# Altium PCB AX309.REV.1.0.PcbDoc (part 3 of 10)
Units mil, origin at the board's own origin, x right, y up, seen from the top; angles counter-clockwise.
Board outline 5185 x 3614 mil, 4 copper layers (Top Layer, GND, Mid-Layer 1, Bottom Layer); 191 components, 352 nets, 1106 pads, 425 vias.
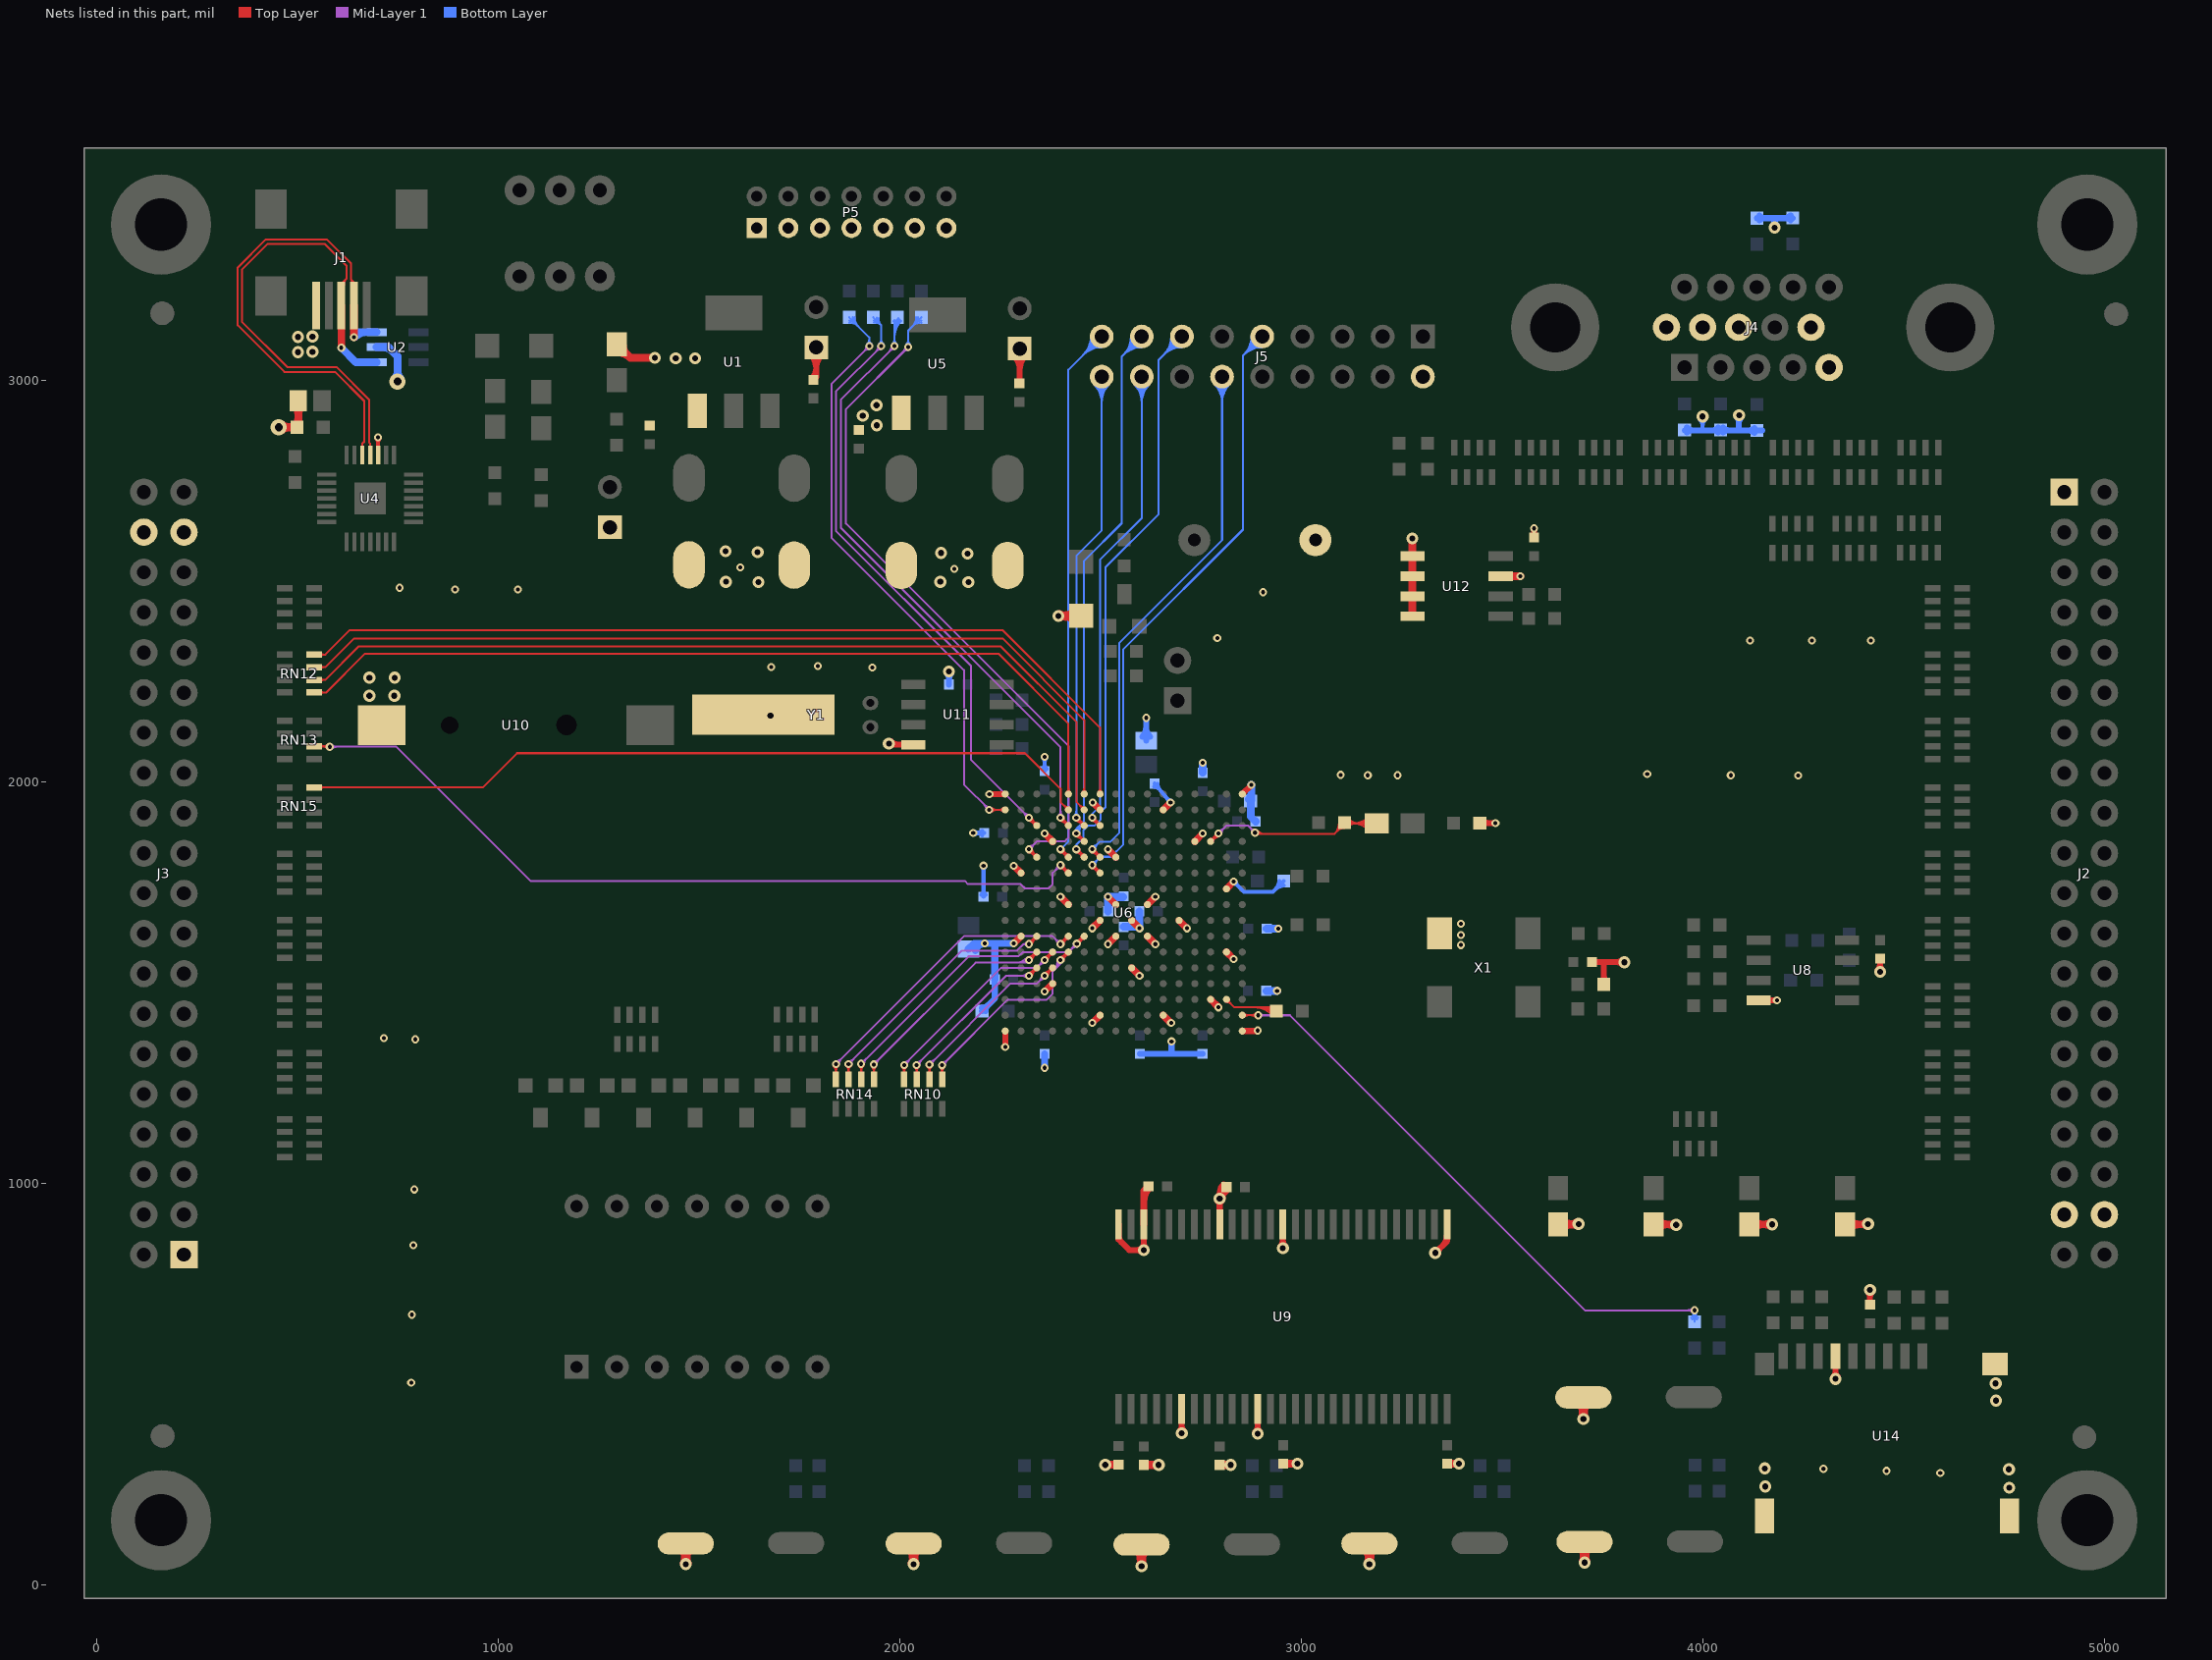
[diagram p5: the nets of this part, all layers, seen from the top]

## Via types
v1: diameter 20, hole 10, Top Layer to Bottom Layer, 328 vias
v2: diameter 30, hole 15, Top Layer to Bottom Layer, 95 vias
v3: diameter 40, hole 20, Top Layer to Bottom Layer, 2 vias

## Nets (pads, with @x,y where several pads share a name; then routed paths per layer and width w, separated by ;. In a path a pad name is that pad's centre, name@x,y a point inside that pad or via, vN(x,y) a via of type N, cw(c..) or ccw(c..) an arc to the next point about the centre after c; other vN are vias at no path point) (continued)
DIG0: RN14.7 U6.C7 | length 885.6
  Top Layer w5: v1@1867.19,1291.19 cw(c1854.39,1278.39) 1872.5,1278.39 cw(c1890.6,1278.39) v1@1877.8,1291.19 ; RN14.7@1868.7,1273.76 ccw(c1859.52,1282.93) 1872.5,1282.93 ccw(c1885.47,1282.93) RN14.7@1876.3,1273.76 ; RN14.7@1872.5,1258.15 v1(1872.5,1296.5) ; v1@2320.77,1602.69 ccw(c2318.06,1622.67) U6.C7@2335.52,1612.59 ; v1@2321.44,1597.74 ccw(c2319.79,1609.9) 2330.42,1603.76 ; v1(2321.78,1595.26) U6.C7@2341.46,1614.94 ; v1@2321.78,1602.76 ccw(c2321.78,1620.87) 2334.58,1608.06 ccw(c2347.39,1595.26) v1@2329.28,1595.26 ; v1@2323.75,1602.5 ccw(c2325.56,1609.16) 2331.54,1605.71 ; v1@2324.26,1594.92 cw(c2336.42,1593.27) 2330.28,1603.9 ; v1@2329.02,1597.23 cw(c2335.68,1599.04) 2332.23,1605.02 ; v1@2329.21,1594.25 cw(c2349.19,1591.54) U6.C7@2339.11,1609 ; U6.C7@2335.11,1614.94 cw(c2319.76,1614.94) 2330.61,1604.09 cw(c2341.46,1593.24) U6.C7@2341.46,1608.59 ; v1@2323.72,1602.5 ccw(c2325.55,1609.33) 2329.08,1603.21 cw(c2325.55,1609.33) v1@2323.72,1602.5 ; v1@2329.02,1597.2 cw(c2335.85,1599.03) 2329.73,1602.56 ccw(c2335.85,1599.03) v1@2329.02,1597.2
  Mid-Layer 1 w5: v1(1872.5,1296.5) 2155,1579 2292,1579 2308.26,1595.26 ; v1@1872.5,1304 ccw(c1872.5,1322.1) 1885.3,1309.3 ccw(c1898.1,1296.5) v1@1880,1296.5 ; v1@2315.42,1591.29 ccw(c2308.26,1586.82) 2308.26,1595.26 ; v1@2315.42,1599.23 cw(c2308.26,1603.69) 2308.26,1595.26 ; v1(2321.78,1595.26) 2308.26,1595.26
DIG1: RN10.5 U6.E6 | length 801.5
  Top Layer w5: v1@2100.18,1288.18 cw(c2087.38,1275.38) 2105.49,1275.38 cw(c2123.59,1275.38) v1@2110.79,1288.18 ; RN10.5@2101.69,1273.76 ccw(c2092.51,1282.93) 2105.49,1282.93 ccw(c2118.46,1282.93) RN10.5@2109.29,1273.76 ; RN10.5@2105.49,1258.15 v1(2105.49,1293.49) ; v1@2399.51,1563.32 ccw(c2396.8,1583.3) U6.E6@2414.26,1573.22 ; v1@2400.18,1558.37 ccw(c2398.53,1570.53) 2409.16,1564.39 ; v1(2400.52,1555.89) U6.E6@2420.2,1575.57 ; v1@2400.52,1563.39 ccw(c2400.52,1581.5) 2413.32,1568.69 ccw(c2426.13,1555.89) v1@2408.02,1555.89 ; v1@2402.49,1563.13 ccw(c2404.3,1569.79) 2410.28,1566.34 ; v1@2403,1555.55 cw(c2415.16,1553.9) 2409.02,1564.53 ; v1@2407.95,1554.88 cw(c2427.93,1552.17) U6.E6@2417.85,1569.63 ; 2410.97,1565.65 ccw(c2414.42,1559.67) v1@2407.76,1557.86 ; U6.E6@2413.85,1575.57 cw(c2398.5,1575.57) 2409.35,1564.72 cw(c2420.2,1553.87) U6.E6@2420.2,1569.22 ; v1@2407.76,1557.83 cw(c2414.59,1559.66) 2408.47,1563.19 ccw(c2414.59,1559.66) v1@2407.76,1557.83 ; v1@2402.46,1563.13 ccw(c2404.29,1569.96) 2407.82,1563.84 cw(c2404.29,1569.96) v1@2402.46,1563.13
  Mid-Layer 1 w5: v1(2105.49,1293.49) 2269,1457 2366,1457 2381,1472 2381,1527 2400.52,1546.52 v1(2400.52,1555.89) ; v1@2105.49,1300.99 ccw(c2105.49,1319.09) 2118.29,1306.29 ccw(c2131.09,1293.49) v1@2112.99,1293.49 ; 2381.09,1527.09 ccw(c2352.29,1555.89) v1@2393.02,1555.89 ; 2389.63,1535.63 ccw(c2369.36,1555.89) v1@2398.02,1555.89 ; 2398.16,1544.16 ccw(c2386.43,1555.89) v1@2403.02,1555.89
DIG2: RN10.7 U6.C5 | length 695.9
  Top Layer w5: v1@2036.7,1288.7 cw(c2022.7,1274.7) RN10.7@2042.5,1274.7 ; RN10.7@2038.7,1273.76 ccw(c2029.52,1282.93) 2042.5,1282.93 ccw(c2055.47,1282.93) RN10.7@2046.3,1273.76 ; RN10.7@2042.5,1258.15 v1@2042.5,1296.5 ; RN10.7@2042.5,1277.09 cw(c2058.91,1277.09) v1@2047.3,1288.7 ; v1@2320.77,1523.95 ccw(c2318.06,1543.93) U6.C5@2335.52,1533.85 ; v1@2321.44,1519 ccw(c2319.79,1531.16) 2330.42,1525.02 ; v1(2321.78,1516.52) U6.C5@2341.46,1536.2 ; v1@2321.78,1524.02 ccw(c2321.78,1542.13) 2334.58,1529.32 ccw(c2347.39,1516.52) v1@2329.28,1516.52 ; v1@2323.75,1523.76 ccw(c2325.56,1530.42) 2331.54,1526.97 ; v1@2324.26,1516.18 cw(c2336.42,1514.53) 2330.28,1525.16 ; v1@2329.02,1518.49 cw(c2335.68,1520.3) 2332.23,1526.28 ; v1@2329.21,1515.51 cw(c2349.19,1512.8) U6.C5@2339.11,1530.26 ; U6.C5@2335.11,1536.2 cw(c2319.76,1536.2) 2330.61,1525.35 cw(c2341.46,1514.5) U6.C5@2341.46,1529.85 ; v1@2323.72,1523.76 ccw(c2325.55,1530.59) 2329.08,1524.47 cw(c2325.55,1530.59) v1@2323.72,1523.76 ; v1@2329.02,1518.46 cw(c2335.85,1520.29) 2329.73,1523.82 ccw(c2335.85,1520.29) v1@2329.02,1518.46
  Mid-Layer 1 w5: v1(2042,1294) 2264.52,1516.52 v1(2321.78,1516.52) ; v1@2042,1301.5 ccw(c2042,1319.61) 2054.8,1306.8 ccw(c2067.61,1294) v1@2049.5,1294 ; v1@2316.48,1511.22 ccw(c2303.67,1498.41) 2303.67,1516.52 ccw(c2303.67,1534.63) v1@2316.48,1521.82
DIG3: RN14.6 U6.F7 | length 976.8
  Top Layer w5: v1@1898.69,1291.69 cw(c1885.89,1278.89) 1903.99,1278.89 cw(c1922.1,1278.89) v1@1909.3,1291.69 ; RN14.6@1900.19,1273.76 ccw(c1891.02,1282.93) 1903.99,1282.93 ccw(c1916.97,1282.93) RN14.6@1907.79,1273.76 ; RN14.6@1903.99,1258.15 v1(1903.99,1296.99) ; v1@2440.26,1603.83 ccw(c2438.55,1621.02) U6.F7@2453.51,1612.38 ; v1@2440.75,1598.86 ccw(c2439.74,1609.08) 2448.64,1603.95 ; v1(2441,1596.37) U6.F7@2459.57,1614.94 ; v1@2441,1603.87 ccw(c2441,1621.98) 2453.8,1609.17 ccw(c2466.61,1596.37) v1@2448.5,1596.37 ; v1@2443.49,1596.12 cw(c2453.71,1595.11) 2448.58,1604.01 ; v1@2443.64,1603.39 ccw(c2445.34,1607.93) 2449.54,1605.5 ; v1@2448.02,1599.01 cw(c2452.56,1600.71) 2450.13,1604.91 ; v1@2448.46,1595.63 cw(c2465.65,1593.92) U6.F7@2457.01,1608.88 ; U6.F7@2453.22,1614.94 cw(c2437.87,1614.94) 2448.72,1604.09 cw(c2459.57,1593.24) U6.F7@2459.57,1608.59 ; v1@2442.94,1603.61 ccw(c2445.13,1611.78) 2449.36,1604.46 cw(c2445.13,1611.78) v1@2442.94,1603.61 ; v1@2448.24,1598.31 cw(c2456.41,1600.5) 2449.09,1604.73 ccw(c2456.41,1600.5) v1@2448.24,1598.31
  Mid-Layer 1 w5: v1(1903.99,1296.99) 2172,1565 2296,1565 2306,1575 2419.63,1575 v1(2441,1596.37) ; v1@1903.99,1304.49 ccw(c1903.99,1322.6) 1916.8,1309.8 ccw(c1929.6,1296.99) v1@1911.49,1296.99 ; v1@2433.5,1596.37 cw(c2415.39,1596.37) 2428.2,1583.57 cw(c2441,1570.76) v1@2441,1588.87
DIG4: RN10.8 U6.D6 | length 780.1
  Top Layer w5: v1@2005.7,1288.7 cw(c1992.89,1275.89) 2011,1275.89 cw(c2029.11,1275.89) v1@2016.3,1288.7 ; RN10.8@2007.2,1273.76 ccw(c1998.03,1282.93) 2011,1282.93 ccw(c2023.97,1282.93) RN10.8@2014.8,1273.76 ; RN10.8@2011,1258.15 v1(2011,1294) ; v1@2360.14,1563.32 ccw(c2357.43,1583.3) U6.D6@2374.89,1573.22 ; v1@2360.81,1558.37 ccw(c2359.16,1570.53) 2369.79,1564.39 ; v1(2361.15,1555.89) U6.D6@2380.83,1575.57 ; v1@2361.15,1563.39 ccw(c2361.15,1581.5) 2373.95,1568.69 ccw(c2386.76,1555.89) v1@2368.65,1555.89 ; v1@2363.63,1555.55 cw(c2375.79,1553.9) 2369.65,1564.53 ; v1@2368.58,1554.88 cw(c2388.56,1552.17) U6.D6@2378.48,1569.63 ; 2370.91,1566.34 cw(c2364.93,1569.79) v1@2363.12,1563.13 ; 2371.6,1565.65 ccw(c2375.05,1559.67) v1@2368.39,1557.86 ; U6.D6@2374.48,1575.57 cw(c2359.13,1575.57) 2369.98,1564.72 cw(c2380.83,1553.87) U6.D6@2380.83,1569.22 ; v1@2363.09,1563.13 ccw(c2364.92,1569.96) 2368.45,1563.84 cw(c2364.92,1569.96) v1@2363.09,1563.13 ; v1@2368.39,1557.83 cw(c2375.22,1559.66) 2369.1,1563.19 ccw(c2375.22,1559.66) v1@2368.39,1557.83
  Mid-Layer 1 w5: v1(2011,1294) 2253.2,1536.2 2341.46,1536.2 v1(2361.15,1555.89) ; v1@2011,1301.5 ccw(c2011,1319.61) 2023.8,1306.8 ccw(c2036.61,1294) v1@2018.5,1294 ; v1@2353.65,1555.89 cw(c2335.54,1555.89) 2348.35,1543.09 cw(c2361.15,1530.28) v1@2361.15,1548.39
DIG5: RN14.8 U6.E7 | length 1023.3
  Top Layer w5: v1@1835.7,1290.7 cw(c1822.89,1277.89) 1841,1277.89 cw(c1859.11,1277.89) v1@1846.3,1290.7 ; RN14.8@1837.2,1273.76 ccw(c1828.03,1282.93) 1841,1282.93 ccw(c1853.97,1282.93) RN14.8@1844.8,1273.76 ; RN14.8@1841,1258.15 v1(1841,1296) ; v1@2399.51,1602.69 ccw(c2396.8,1622.67) U6.E7@2414.26,1612.59 ; v1@2400.18,1597.74 ccw(c2398.53,1609.9) 2409.16,1603.76 ; v1(2400.52,1595.26) U6.E7@2420.2,1614.94 ; v1@2400.52,1602.76 ccw(c2400.52,1620.87) 2413.32,1608.06 ccw(c2426.13,1595.26) v1@2408.02,1595.26 ; v1@2402.49,1602.5 ccw(c2404.3,1609.16) 2410.28,1605.71 ; v1@2403,1594.92 cw(c2415.16,1593.27) 2409.02,1603.9 ; v1@2407.76,1597.23 cw(c2414.42,1599.04) 2410.97,1605.02 ; v1@2407.95,1594.25 cw(c2427.93,1591.54) U6.E7@2417.85,1609 ; U6.E7@2413.85,1614.94 cw(c2398.5,1614.94) 2409.35,1604.09 cw(c2420.2,1593.24) U6.E7@2420.2,1608.59 ; v1@2402.46,1602.5 ccw(c2404.29,1609.33) 2407.82,1603.21 cw(c2404.29,1609.33) v1@2402.46,1602.5 ; v1@2407.76,1597.2 cw(c2414.59,1599.03) 2408.47,1602.56 ccw(c2414.59,1599.03) v1@2407.76,1597.2
  Mid-Layer 1 w5: v1(1841,1296) 2160,1615 2380.78,1615 v1(2400.52,1595.26) ; v1@1841,1303.5 ccw(c1841,1321.61) 1853.8,1308.8 ccw(c1866.61,1296) v1@1848.5,1296 ; v1@2393.02,1595.26 ccw(c2374.91,1595.26) 2387.72,1608.06 ccw(c2400.52,1620.87) v1@2400.52,1602.76
DIG6: RN10.6 U6.D5 | length 701.4
  Top Layer w5: v1@2068.69,1289.69 cw(c2055.89,1276.89) 2073.99,1276.89 cw(c2092.1,1276.89) v1@2079.3,1289.69 ; RN10.6@2070.19,1273.76 ccw(c2061.02,1282.93) 2073.99,1282.93 ccw(c2086.97,1282.93) RN10.6@2077.79,1273.76 ; RN10.6@2073.99,1258.15 v1(2073.99,1294.99) ; v1@2360.14,1523.95 ccw(c2357.43,1543.93) U6.D5@2374.89,1533.85 ; v1@2360.81,1519 ccw(c2359.16,1531.16) 2369.79,1525.02 ; v1(2361.15,1516.52) U6.D5@2380.83,1536.2 ; v1@2361.15,1524.02 ccw(c2361.15,1542.13) 2373.95,1529.32 ccw(c2386.76,1516.52) v1@2368.65,1516.52 ; v1@2363.63,1516.18 cw(c2375.79,1514.53) 2369.65,1525.16 ; v1@2368.39,1518.49 cw(c2375.05,1520.3) 2371.6,1526.28 ; v1@2368.58,1515.51 cw(c2388.56,1512.8) U6.D5@2378.48,1530.26 ; 2370.91,1526.97 cw(c2364.93,1530.42) v1@2363.12,1523.76 ; U6.D5@2374.48,1536.2 cw(c2359.13,1536.2) 2369.98,1525.35 cw(c2380.83,1514.5) U6.D5@2380.83,1529.85 ; v1@2363.09,1523.76 ccw(c2364.92,1530.59) 2368.45,1524.47 cw(c2364.92,1530.59) v1@2363.09,1523.76 ; v1@2368.39,1518.46 cw(c2375.22,1520.29) 2369.1,1523.82 ccw(c2375.22,1520.29) v1@2368.39,1518.46
  Mid-Layer 1 w5: v1(2073.99,1294.99) 2276,1497 2341.63,1497 v1(2361.15,1516.52) ; v1@2073.99,1302.49 ccw(c2073.99,1320.6) 2086.8,1307.8 ccw(c2099.6,1294.99) v1@2081.49,1294.99 ; v1@2353.65,1516.52 cw(c2335.54,1516.52) 2348.35,1503.72 cw(c2361.15,1490.91) v1@2361.15,1509.02
DIG7: RN14.5 U6.C6 | length 858.3
  Top Layer w5: v1@1930.18,1290.21 cw(c1917.38,1277.41) 1935.49,1277.41 cw(c1953.59,1277.41) v1@1940.79,1290.21 ; RN14.5@1931.69,1273.76 ccw(c1922.51,1282.93) 1935.49,1282.93 ccw(c1948.46,1282.93) RN14.5@1939.29,1273.76 ; RN14.5@1935.49,1258.15 v1(1935.49,1295.51) ; v1@2320.77,1563.32 ccw(c2318.06,1583.3) U6.C6@2335.52,1573.22 ; v1@2321.44,1558.37 ccw(c2319.79,1570.53) 2330.42,1564.39 ; v1(2321.78,1555.89) U6.C6@2341.46,1575.57 ; v1@2321.78,1563.39 ccw(c2321.78,1581.5) 2334.58,1568.69 ccw(c2347.39,1555.89) v1@2329.28,1555.89 ; v1@2323.75,1563.13 ccw(c2325.56,1569.79) 2331.54,1566.34 ; v1@2324.26,1555.55 cw(c2336.42,1553.9) 2330.28,1564.53 ; v1@2329.21,1554.88 cw(c2349.19,1552.17) U6.C6@2339.11,1569.63 ; 2332.23,1565.65 ccw(c2335.68,1559.67) v1@2329.02,1557.86 ; U6.C6@2335.11,1575.57 cw(c2319.76,1575.57) 2330.61,1564.72 cw(c2341.46,1553.87) U6.C6@2341.46,1569.22 ; v1@2329.02,1557.83 cw(c2335.85,1559.66) 2329.73,1563.19 ccw(c2335.85,1559.66) v1@2329.02,1557.83 ; v1@2323.72,1563.13 ccw(c2325.55,1569.96) 2329.08,1563.84 cw(c2325.55,1569.96) v1@2323.72,1563.13
  Mid-Layer 1 w5: v1(1935.49,1295.51) 2188.98,1549 2314.89,1549 v1(2321.78,1555.89) ; v1@1935.49,1303.01 ccw(c1935.49,1321.12) 1948.29,1308.32 ccw(c1961.09,1295.51) v1@1942.99,1295.51 ; 2287.04,1549 ccw(c2287.04,1590.63) v1@2316.48,1561.19 ; 2299.11,1549 ccw(c2299.11,1578.56) v1@2320.01,1557.66 ; 2311.18,1549 ccw(c2311.18,1566.48) v1@2323.55,1554.12
DM: J1.2 U2.3 U4.5 | length 1328.1
  Top Layer w5: J1.2@634.29,3239.43 ccw(c626.41,3244.41) 633,3251 ; 637.42,3246.58 cw(c631.83,3240.99) J1.2@638.52,3236.76 ; J1.2@640.5,3186.3 640.5,3243.5 633,3251 ; U4.5@659.27,2834.3 ccw(c654.46,2839.1) 661.26,2839.1 ccw(c668.06,2839.1) U4.5@663.25,2834.3 ; U4.5@661.26,2814 661.26,2842.26 666,2847 666,2948.44 593.44,3021 467,3021 351,3137 351,3281 421,3351 573,3351 633,3291 633,3251
  Top Layer w19: v1(640.5,3107) J1.2@640.5,3186.3
  Bottom Layer w19: v1(640.5,3107) 653.5,3120 U2.3@697,3120 ; v1@640.85,3106.65 cw(c673.09,3074.41) U2.3@673.09,3120
DP: J1.3 U2.1 U4.4 | length 1329.8
  Top Layer w5: J1.3@609,3186.3 609,3241 622,3254 ; J1.3@611.32,3235.86 cw(c624.19,3237.78) 614.99,3246.99 ; J1.3@616.26,3236.6 cw(c636.39,3239.61) 622,3254 ; U4.4@678.95,2834.3 ccw(c674.15,2839.1) 680.94,2839.1 ccw(c687.74,2839.1) U4.4@682.94,2834.3 ; U4.4@680.94,2814 680.94,2842.06 677.97,2845.03 677.97,2952.03 597,3033 474,3033 362,3145 362,3276.44 425.56,3340 567,3340 622,3285 622,3254
  Top Layer w19: v1(609,3081) J1.3@609,3186.3
  Bottom Layer w19: v1(609,3081) 645,3045 U2.1@697,3045
E11: RN13.6 U6.E11 | length 2330.2
  Top Layer w5: RN13.6@541.15,2088.26 v1@578.74,2088.26 ; RN13.6@556.76,2084.46 cw(c565.93,2075.28) 565.93,2088.26 cw(c565.93,2101.23) RN13.6@556.76,2092.06 ; RN13.6@558.86,2088.26 cw(c558.86,2065.86) v1@574.7,2081.7 ; 564.93,2088.26 ccw(c564.93,2102.07) v1@574.7,2092.3 ; v1@2399.51,1784.68 cw(c2396.8,1764.7) U6.E11@2414.26,1774.78 ; v1@2400.18,1789.63 cw(c2398.53,1777.47) 2409.16,1783.61 ; v1@2400.52,1784.61 cw(c2400.52,1766.5) 2413.32,1779.31 cw(c2426.13,1792.11) v1@2408.02,1792.11 ; v1(2400.52,1792.11) U6.E11@2420.2,1772.43 ; v1@2402.49,1784.87 cw(c2404.3,1778.21) 2410.28,1781.66 ; v1@2403,1792.45 ccw(c2415.16,1794.1) 2409.02,1783.47 ; v1@2407.95,1793.12 ccw(c2427.93,1795.83) U6.E11@2417.85,1778.37 ; 2410.97,1782.35 cw(c2414.42,1788.33) v1@2407.76,1790.14 ; U6.E11@2413.85,1772.43 ccw(c2398.5,1772.43) 2409.35,1783.28 ccw(c2420.2,1794.13) U6.E11@2420.2,1778.78 ; v1@2407.76,1790.17 ccw(c2414.59,1788.34) 2408.47,1784.81 cw(c2414.59,1788.34) v1@2407.76,1790.17 ; v1@2402.46,1784.87 cw(c2404.29,1778.04) 2407.82,1784.16 ccw(c2404.29,1778.04) v1@2402.46,1784.87
  Mid-Layer 1 w5: v1(580,2087) 746,2087 1081,1752 2163,1752 2170,1745 2301,1745 2312,1734 2370,1734 2381,1745 2381,1772.59 v1(2400.52,1792.11) ; v1@585.3,2081.7 cw(c598.11,2068.89) 598.11,2087 cw(c598.11,2105.11) v1@585.3,2092.3 ; v1@2393.02,1792.11 cw(c2374.91,1792.11) 2387.72,1779.31 cw(c2400.52,1766.5) v1@2400.52,1784.61
E12: J5.17 U6.E12 | length 1750.7
  Top Layer w5: v1@2399.51,1824.05 cw(c2396.8,1804.07) U6.E12@2414.26,1814.15 ; v1@2400.18,1829 cw(c2398.53,1816.84) 2409.16,1822.98 ; v1@2400.52,1823.98 cw(c2400.52,1805.87) 2413.32,1818.68 cw(c2426.13,1831.48) v1@2408.02,1831.48 ; v1(2400.52,1831.48) U6.E12@2420.2,1811.8 ; v1@2402.49,1824.24 cw(c2404.3,1817.58) 2410.28,1821.03 ; v1@2403,1831.82 ccw(c2415.16,1833.47) 2409.02,1822.84 ; v1@2407.76,1829.51 ccw(c2414.42,1827.7) 2410.97,1821.72 ; v1@2407.95,1832.49 ccw(c2427.93,1835.2) U6.E12@2417.85,1817.74 ; U6.E12@2413.85,1811.8 ccw(c2398.5,1811.8) 2409.35,1822.65 ccw(c2420.2,1833.5) U6.E12@2420.2,1818.15 ; v1@2402.46,1824.24 cw(c2404.29,1817.41) 2407.82,1823.53 ccw(c2404.29,1817.41) v1@2402.46,1824.24 ; v1@2407.76,1829.54 ccw(c2414.59,1827.71) 2408.47,1824.18 cw(c2414.59,1827.71) v1@2407.76,1829.54
  Bottom Layer w5: v1(2400.52,1831.48) 2420,1850.96 2420,3026.17 J5.17@2503,3109.17 ; J5.17@2475.97,3109.17 cw(c2410.72,3109.17) 2456.86,3063.03 cw(c2503,3016.9) J5.17@2503,3082.15 ; J5.17@2480.97,3109.17 cw(c2427.79,3109.17) 2465.4,3071.57 cw(c2503,3033.97) J5.17@2503,3087.15 ; J5.17@2485.97,3109.17 cw(c2444.86,3109.17) 2473.93,3080.11 cw(c2503,3051.04) J5.17@2503,3092.15
E15: RN15.8 U6.E15 | length 2036.5
  Top Layer w5: RN15.8@541.15,1985.88 961.88,1985.88 1047,2071 2312,2071 2401,1982 2401,1949.11 U6.E15@2420.2,1929.91 ; RN15.8@556.76,1982.08 cw(c565.93,1972.9) 565.93,1985.88 cw(c565.93,1998.85) RN15.8@556.76,1989.67 ; U6.E15@2413.85,1929.91 ccw(c2398.5,1929.91) 2409.35,1940.76 ccw(c2420.2,1951.61) U6.E15@2420.2,1936.26
E16: RN12.5 U6.E16 | length 2211.3
  Top Layer w5: RN12.5@541.15,2222.14 571.14,2222.14 668,2319 2246,2319 2420.2,2144.8 U6.E16@2420.2,1969.28 ; RN12.5@556.76,2218.34 cw(c565.93,2209.16) 565.93,2222.14 cw(c565.93,2235.11) RN12.5@556.76,2225.94 ; U6.E16@2415.71,1973.77 ccw(c2404.85,1984.63) 2420.2,1984.63 ccw(c2435.55,1984.63) U6.E16@2424.7,1973.77
F12: J5.13 U6.F12 | length 1838
  Top Layer w5: v1@2438.88,1824.05 cw(c2436.17,1804.07) U6.F12@2453.63,1814.15 ; v1@2439.55,1829 cw(c2437.9,1816.84) 2448.53,1822.98 ; v1@2439.89,1823.98 cw(c2439.89,1805.87) 2452.69,1818.68 cw(c2465.5,1831.48) v1@2447.39,1831.48 ; v1(2439.89,1831.48) U6.F12@2459.57,1811.8 ; v1@2442.37,1831.82 ccw(c2454.53,1833.47) 2448.39,1822.84 ; v1@2447.13,1829.51 ccw(c2453.79,1827.7) 2450.34,1821.72 ; v1@2447.32,1832.49 ccw(c2467.3,1835.2) U6.F12@2457.22,1817.74 ; 2449.65,1821.03 ccw(c2443.67,1817.58) v1@2441.86,1824.24 ; U6.F12@2453.22,1811.8 ccw(c2437.87,1811.8) 2448.72,1822.65 ccw(c2459.57,1833.5) U6.F12@2459.57,1818.15 ; v1@2441.83,1824.24 cw(c2443.66,1817.41) 2447.19,1823.53 ccw(c2443.66,1817.41) v1@2441.83,1824.24 ; v1@2447.13,1829.54 ccw(c2453.96,1827.71) 2447.84,1824.18 cw(c2453.96,1827.71) v1@2447.13,1829.54
  Bottom Layer w5: v1@2436.92,1838.37 ccw(c2434.96,1842.89) 2439.89,1842.89 ; v1(2439.89,1831.48) 2439.89,1842.89 ; v1@2442.86,1838.37 cw(c2444.81,1842.89) 2439.89,1842.89 ; J5.13@2675.97,3109.17 cw(c2610.72,3109.17) 2656.86,3063.03 cw(c2703,3016.9) J5.13@2703,3082.15 ; J5.13@2680.97,3109.17 cw(c2627.79,3109.17) 2665.4,3071.57 cw(c2703,3033.97) J5.13@2703,3087.15 ; J5.13@2685.97,3109.17 cw(c2644.86,3109.17) 2673.93,3080.11 cw(c2703,3051.04) J5.13@2703,3092.15 ; J5.13@2703,3109.17 2645,3051.17 2645,2667 2513,2535 2513,1937 2500,1924 2500,1905 2486,1891 2470,1891 2458,1879 2458,1861 2439.89,1842.89
F13: J5.15 U6.F13 | length 1826.1
  Top Layer w5: v1@2438.88,1863.42 cw(c2436.17,1843.44) U6.F13@2453.63,1853.52 ; v1@2439.55,1868.37 cw(c2437.9,1856.21) 2448.53,1862.35 ; v1@2439.89,1863.35 cw(c2439.89,1845.24) 2452.69,1858.05 cw(c2465.5,1870.85) v1@2447.39,1870.85 ; v1(2439.89,1870.85) U6.F13@2459.57,1851.17 ; v1@2442.37,1871.19 ccw(c2454.53,1872.84) 2448.39,1862.21 ; v1@2447.32,1871.86 ccw(c2467.3,1874.57) U6.F13@2457.22,1857.11 ; 2449.65,1860.4 ccw(c2443.67,1856.95) v1@2441.86,1863.61 ; 2450.34,1861.09 cw(c2453.79,1867.07) v1@2447.13,1868.88 ; U6.F13@2453.22,1851.17 ccw(c2437.87,1851.17) 2448.72,1862.02 ccw(c2459.57,1872.87) U6.F13@2459.57,1857.52 ; v1@2441.83,1863.61 cw(c2443.66,1856.78) 2447.19,1862.9 ccw(c2443.66,1856.78) v1@2441.83,1863.61 ; v1@2447.13,1868.91 ccw(c2453.96,1867.08) 2447.84,1863.55 cw(c2453.96,1867.08) v1@2447.13,1868.91
  Bottom Layer w5: v1@2436.58,1877.58 ccw(c2433.98,1882.89) 2439.89,1882.89 ; v1@2437.39,1870.7 cw(c2457.67,1871.94) 2443.3,1886.3 ; v1(2439.89,1870.85) 2439.89,1882.89 ; v1@2442.38,1871 cw(c2472.46,1872.85) 2451.15,1894.15 ; v1@2443.19,1877.58 cw(c2445.8,1882.89) 2439.89,1882.89 ; v1@2447.37,1871.31 cw(c2487.24,1873.76) 2459,1902 ; J5.15@2575.97,3109.17 cw(c2510.72,3109.17) 2556.86,3063.03 cw(c2603,3016.9) J5.15@2603,3082.15 ; J5.15@2580.97,3109.17 cw(c2527.79,3109.17) 2565.4,3071.57 cw(c2603,3033.97) J5.15@2603,3087.15 ; J5.15@2585.97,3109.17 cw(c2544.86,3109.17) 2573.93,3080.11 cw(c2603,3051.04) J5.15@2603,3092.15 ; J5.15@2603,3109.17 2553,3059.17 2553,2644 2459,2550 2459,1902 ; 2439.89,1882.89 2459,1902
F14: J5.18 U6.F14 | length 1584.1
  Top Layer w5: v1@2438.88,1902.79 cw(c2436.17,1882.81) U6.F14@2453.63,1892.89 ; v1@2439.55,1907.74 cw(c2437.9,1895.58) 2448.53,1901.72 ; v1@2439.89,1902.72 cw(c2439.89,1884.61) 2452.69,1897.42 cw(c2465.5,1910.22) v1@2447.39,1910.22 ; v1(2439.89,1910.22) U6.F14@2459.57,1890.54 ; v1@2442.37,1910.56 ccw(c2454.53,1912.21) 2448.39,1901.58 ; v1@2447.13,1908.25 ccw(c2453.79,1906.44) 2450.34,1900.46 ; v1@2447.32,1911.23 ccw(c2467.3,1913.94) U6.F14@2457.22,1896.48 ; 2449.65,1899.77 ccw(c2443.67,1896.32) v1@2441.86,1902.98 ; U6.F14@2453.22,1890.54 ccw(c2437.87,1890.54) 2448.72,1901.39 ccw(c2459.57,1912.24) U6.F14@2459.57,1896.89 ; v1@2441.83,1902.98 cw(c2443.66,1896.15) 2447.19,1902.27 ccw(c2443.66,1896.15) v1@2441.83,1902.98 ; v1@2447.13,1908.28 ccw(c2453.96,1906.45) 2447.84,1902.92 cw(c2453.96,1906.45) v1@2447.13,1908.28
  Bottom Layer w5: v1@2434.59,1915.52 ccw(c2421.78,1928.33) 2439.89,1928.33 ccw(c2458,1928.33) v1@2445.19,1915.52 ; v1(2439.89,1910.22) 2439.89,2562.89 2503,2626 J5.18@2503,3009.17 ; J5.18@2483.89,2990.06 cw(c2437.75,2943.92) 2503,2943.92 cw(c2568.25,2943.92) J5.18@2522.11,2990.06 ; J5.18@2487.42,2993.6 cw(c2449.82,2955.99) 2503,2955.99 cw(c2556.18,2955.99) J5.18@2518.58,2993.6 ; J5.18@2490.96,2997.13 cw(c2461.89,2968.07) 2503,2968.07 cw(c2544.11,2968.07) J5.18@2515.04,2997.13
F15: RN12.6 U6.F15 | length 2282.9
  Top Layer w5: RN12.6@541.15,2253.63 568.63,2253.63 652,2337 2252,2337 2440,2149 2440,1949.48 U6.F15@2459.57,1929.91 ; RN12.6@556.76,2249.83 cw(c565.93,2240.66) 565.93,2253.63 cw(c565.93,2266.61) RN12.6@556.76,2257.43 ; U6.F15@2453.22,1929.91 ccw(c2437.87,1929.91) 2448.72,1940.76 ccw(c2459.57,1951.61) U6.F15@2459.57,1936.26
F16: RN12.7 U6.F16 | length 2261.2
  Top Layer w5: RN12.7@541.15,2285.13 568.84,2285.13 640.71,2357 2256,2357 2459.57,2153.43 U6.F16@2459.57,1969.28 ; RN12.7@556.76,2281.33 cw(c565.93,2272.15) 565.93,2285.13 cw(c565.93,2298.1) RN12.7@556.76,2288.93 ; U6.F16@2455.08,1973.77 ccw(c2444.22,1984.63) 2459.57,1984.63 ccw(c2474.92,1984.63) U6.F16@2464.07,1973.77
FPGA_DONE: LED5.1 R17.1 U6.P13 | length 1043.5
  Top Layer w5: U6.P13@2774.54,1851.17 v1(2794.22,1870.85) ; U6.P13@2774.54,1857.52 ccw(c2774.54,1872.87) 2785.39,1862.02 ccw(c2796.24,1851.17) U6.P13@2780.89,1851.17 ; U6.P13@2776.89,1857.11 ccw(c2766.81,1874.57) v1@2786.79,1871.86 ; U6.P13@2780.48,1853.52 cw(c2797.94,1843.44) v1@2795.23,1863.42 ; 2783.77,1861.09 ccw(c2780.32,1867.07) v1@2786.98,1868.88 ; 2784.46,1860.4 cw(c2790.44,1856.95) v1@2792.25,1863.61 ; 2785.58,1862.35 cw(c2796.21,1856.21) v1@2794.56,1868.37 ; 2785.72,1862.21 ccw(c2779.58,1872.84) v1@2791.74,1871.19 ; v1@2786.72,1870.85 cw(c2768.61,1870.85) 2781.42,1858.05 cw(c2794.22,1845.24) v1@2794.22,1863.35 ; v1(2885,1873) 2888,1870 3083,1870 ; v1@2886.77,1874.77 ccw(c2898.28,1886.28) 2898.28,1870 ; v1@2890.3,1867.7 cw(c2895.86,1862.14) 2895.86,1870 ; v1@2890.3,1878.3 ccw(c2910.35,1898.35) 2910.35,1870 ; 3090.08,1877.08 cw(c3108,1859.15) R17.1@3108,1884.5 ; 3091.48,1878.48 ccw(c3072.13,1897.84) R17.1@3099.5,1897.96 ; R17.1@3094.5,1897.94 cw(c3055.24,1897.76) 3083,1870 ; R17.1@3114.01,1904.01 ccw(c3133.35,1923.35) 3133.35,1896 ; R17.1@3117.55,1888.45 cw(c3135.76,1870.24) 3135.76,1896 ; R17.1@3117.55,1907.55 ccw(c3145.42,1935.42) 3145.42,1896 ; LED5.1@3167.09,1880.09 ccw(c3128.68,1841.68) 3128.68,1896 ccw(c3128.68,1950.32) LED5.1@3167.09,1911.91 ; LED5.1@3170.63,1883.63 ccw(c3140.75,1853.75) 3140.75,1896 ccw(c3140.75,1938.25) LED5.1@3170.63,1908.37 ; LED5.1@3174.16,1887.16 ccw(c3152.82,1865.82) 3152.82,1896 ccw(c3152.82,1926.18) LED5.1@3174.16,1904.84 ; LED5.1@3188,1896 3109,1896 3083,1870 ; v1@2786.98,1868.91 cw(c2780.15,1867.08) 2786.27,1863.55 ccw(c2780.15,1867.08) v1@2786.98,1868.91 ; 2786.92,1862.9 cw(c2790.45,1856.78) 2792.28,1863.61 ccw(c2790.45,1856.78) 2786.92,1862.9
  Mid-Layer 1 w5: v1(2794.22,1870.85) 2813.91,1890.54 2867.46,1890.54 v1(2885,1873) ; v1@2794.22,1878.35 ccw(c2794.22,1896.46) 2807.02,1883.65 ccw(c2819.83,1870.85) v1@2801.72,1870.85 ; v1@2877.5,1873 ccw(c2859.39,1873) 2872.2,1885.8 ccw(c2885,1898.61) v1@2885,1880.5
FPGA_INIT_B: R9.1 U6.R3 | length 309
  Top Layer w5: U6.R3@2813.91,1451.11 cw(c2813.91,1435.76) 2824.76,1446.61 cw(c2835.61,1457.46) U6.R3@2820.26,1457.46 ; U6.R3@2813.91,1457.46 2833.37,1438 R9.1@2938,1438 ; 2881.27,1438 cw(c2881.27,1371.27) R9.1@2928.45,1418.45 ; 2893.34,1438 cw(c2893.34,1383.34) R9.1@2931.99,1421.99 ; 2905.41,1438 cw(c2905.41,1395.41) R9.1@2935.53,1425.53 ; 2917.48,1438 cw(c2917.48,1407.48) R9.1@2939.06,1429.06
FPGA_PROG_B: R22.1 U6.T2 | length 1696.7
  Top Layer w5: U6.T2@2853.28,1418.09 v1@2892.55,1418.09 ; U6.T2@2857.77,1413.6 cw(c2868.63,1402.74) 2868.63,1418.09 cw(c2868.63,1433.44) U6.T2@2857.77,1422.59 ; 2874.31,1418.09 cw(c2874.31,1399.67) v1@2887.34,1412.7 ; 2874.77,1418.09 ccw(c2874.77,1435.88) v1@2887.34,1423.3
  Mid-Layer 1 w5: v1(2892.65,1418) 2972,1418 3707,683 v1(3980,683) ; v1@2897.95,1412.7 cw(c2910.75,1399.89) 2910.75,1418 cw(c2910.75,1436.11) v1@2897.95,1423.3 ; v1@3974.7,677.7 ccw(c3961.89,664.89) 3961.89,683 ccw(c3961.89,701.11) v1@3974.7,688.3
  Bottom Layer w5: R22.1@3971.31,664.33 ccw(c3955.61,683) v1(3980,683) ; R22.1@3974.53,660.5 ccw(c3964.64,672.26) 3980,672.26 ccw(c3995.36,672.26) R22.1@3985.47,660.5 ; v1@3974.7,677.7 cw(c3961.89,664.89) 3980,664.89 cw(c3998.11,664.89) v1@3985.3,677.7 ; v1@3974.83,677.57 cw(c3970.08,672.58) 3976.73,670.8 cw(c3983.38,669.02) v1@3981.76,675.71 ; v1@3978.24,675.71 cw(c3976.62,669.02) 3983.27,670.8 cw(c3989.92,672.58) v1@3985.17,677.57 ; R22.1@3980,654 v1(3980,683) ; R22.1@3988.69,664.33 cw(c4004.39,683) v1(3980,683)
FPGA_TCK: R28.2 U6.C14 | length 1831.3
  Top Layer w5: v1@2321.04,1902.56 cw(c2318.54,1883.14) U6.C14@2335.49,1892.93 ; v1@2321.68,1907.52 cw(c2320.16,1895.75) 2330.44,1901.68 ; v1@2322,1902.5 cw(c2322,1884.39) 2334.8,1897.2 cw(c2347.61,1910) v1@2329.5,1910 ; v1(2322,1910) U6.C14@2341.46,1890.54 ; v1@2324.09,1902.8 cw(c2325.9,1896.57) 2331.52,1899.81 ; v1@2324.48,1910.32 ccw(c2336.25,1911.84) 2330.32,1901.56 ; v1@2329.2,1907.91 ccw(c2335.43,1906.1) 2332.19,1900.48 ; v1@2329.44,1910.96 ccw(c2348.86,1913.46) U6.C14@2339.07,1896.51 ; U6.C14@2335.11,1890.54 ccw(c2319.76,1890.54) 2330.61,1901.39 ccw(c2341.46,1912.24) U6.C14@2341.46,1896.89 ; v1@2323.94,1902.76 cw(c2325.84,1895.66) 2329.52,1902.02 ccw(c2325.84,1895.66) v1@2323.94,1902.76 ; v1@2329.24,1908.06 ccw(c2336.34,1906.16) 2329.98,1902.48 cw(c2336.34,1906.16) v1@2329.24,1908.06
  Mid-Layer 1 w5: v1@1946.5,3085 cw(c1928.39,3085) 1941.2,3072.2 cw(c1954,3059.39) v1@1954,3077.5 ; v1(1954,3085) 1841,2972 1841,2625 2178,2288 2178,2054 v1(2322,1910) ; v1@2314.5,1910 ccw(c2296.39,1910) 2309.2,1922.8 ccw(c2322,1935.61) v1@2322,1917.5
  Bottom Layer w5: R28.2@1934,3157 1954,3137 ; R28.2@1934.89,3148.55 cw(c1936.41,3134.22) 1946.59,3144.41 cw(c1956.78,3154.59) R28.2@1942.45,3156.11 ; R28.2@1935.42,3143.57 cw(c1937.82,3120.82) 1954,3137 ; R28.2@1947.43,3155.58 ccw(c1970.18,3153.18) 1954,3137 ; v1@1948.7,3090.3 ccw(c1935.89,3103.11) 1954,3103.11 ccw(c1972.11,3103.11) v1@1959.3,3090.3 ; v1(1954,3085) 1954,3137
FPGA_TDI: R48.2 U6.C12 | length 2063.3
  Top Layer w5: v1@2320.77,1824.05 cw(c2318.06,1804.07) U6.C12@2335.52,1814.15 ; v1@2321.44,1829 cw(c2319.79,1816.84) 2330.42,1822.98 ; v1@2321.78,1823.98 cw(c2321.78,1805.87) 2334.58,1818.68 cw(c2347.39,1831.48) v1@2329.28,1831.48 ; v1(2321.78,1831.48) U6.C12@2341.46,1811.8 ; v1@2323.75,1824.24 cw(c2325.56,1817.58) 2331.54,1821.03 ; v1@2324.26,1831.82 ccw(c2336.42,1833.47) 2330.28,1822.84 ; v1@2329.02,1829.51 ccw(c2335.68,1827.7) 2332.23,1821.72 ; v1@2329.21,1832.49 ccw(c2349.19,1835.2) U6.C12@2339.11,1817.74 ; U6.C12@2335.11,1811.8 ccw(c2319.76,1811.8) 2330.61,1822.65 ccw(c2341.46,1833.5) U6.C12@2341.46,1818.15 ; v1@2323.72,1824.24 cw(c2325.55,1817.41) 2329.08,1823.53 ccw(c2325.55,1817.41) v1@2323.72,1824.24 ; v1@2329.02,1829.54 ccw(c2335.85,1827.71) 2329.73,1824.18 cw(c2335.85,1827.71) v1@2329.02,1829.54
  Mid-Layer 1 w5: v1@2013.5,3083 cw(c1995.39,3083) 2008.2,3070.2 cw(c2021,3057.39) v1@2021,3075.5 ; v1(2021,3083) 1866,2928 1866,2643 2421,2088 2421,1862 2410,1851 2341.3,1851 v1(2321.78,1831.48) ; v1@2321.78,1838.98 ccw(c2321.78,1857.09) 2334.58,1844.28 ccw(c2347.39,1831.48) v1@2329.28,1831.48
  Bottom Layer w5: v1@2015.7,3088.3 ccw(c2002.89,3101.11) 2021,3101.11 ccw(c2039.11,3101.11) v1@2026.3,3088.3 ; v1(2021,3083) 2021,3124 R48.2@2054,3157 ; R48.2@2040.5,3157 cw(c2007.91,3157) 2030.95,3133.95 cw(c2054,3110.91) R48.2@2054,3143.5 ; R48.2@2045.5,3157 cw(c2024.98,3157) 2039.49,3142.49 cw(c2054,3127.98) R48.2@2054,3148.5
FPGA_TDO: R29.2 U6.E14 | length 1898.8
  Top Layer w5: v1@2399.51,1902.79 cw(c2396.8,1882.81) U6.E14@2414.26,1892.89 ; v1@2400.18,1907.74 cw(c2398.53,1895.58) 2409.16,1901.72 ; v1@2400.52,1902.72 cw(c2400.52,1884.61) 2413.32,1897.42 cw(c2426.13,1910.22) v1@2408.02,1910.22 ; v1(2400.52,1910.22) U6.E14@2420.2,1890.54 ; v1@2402.49,1902.98 cw(c2404.3,1896.32) 2410.28,1899.77 ; v1@2403,1910.56 ccw(c2415.16,1912.21) 2409.02,1901.58 ; v1@2407.76,1908.25 ccw(c2414.42,1906.44) 2410.97,1900.46 ; v1@2407.95,1911.23 ccw(c2427.93,1913.94) U6.E14@2417.85,1896.48 ; U6.E14@2413.85,1890.54 ccw(c2398.5,1890.54) 2409.35,1901.39 ccw(c2420.2,1912.24) U6.E14@2420.2,1896.89 ; v1@2402.46,1902.98 cw(c2404.29,1896.15) 2407.82,1902.27 ccw(c2404.29,1896.15) v1@2402.46,1902.98 ; v1@2407.76,1908.28 ccw(c2414.59,1906.45) 2408.47,1902.92 cw(c2414.59,1906.45) v1@2407.76,1908.28
  Mid-Layer 1 w5: v1@1979.5,3085 cw(c1961.39,3085) 1974.2,3072.2 cw(c1987,3059.39) v1@1987,3077.5 ; v1(1987,3085) 1853,2951 1853,2633 2400.52,2085.48 v1(2400.52,1910.22) ; v1@2395.22,1915.52 ccw(c2382.41,1928.33) 2400.52,1928.33 ccw(c2418.63,1928.33) v1@2405.82,1915.52
  Bottom Layer w5: v1@1981.7,3090.3 ccw(c1968.89,3103.11) 1987,3103.11 ccw(c2005.11,3103.11) v1@1992.3,3090.3 ; R29.2@1984.45,3147.45 cw(c1978.31,3141.31) R29.2@1987,3141.31 ; v1(1987,3085) R29.2@1987,3150 ; 1987,3107.51 cw(c2043.49,3107.51) R29.2@2003.55,3147.45 ; 1987,3119.58 cw(c2031.42,3119.58) R29.2@2000.01,3150.99 ; 1987,3131.65 cw(c2019.35,3131.65) R29.2@1996.47,3154.53
FPGA_TMS: R8.2 U6.A15 | length 1710.5
  Top Layer w5: v1(2223.09,1929.91) U6.A15@2262.72,1929.91 ; v1@2228.4,1924.6 cw(c2241.2,1911.8) 2241.2,1929.91 cw(c2241.2,1948.01) v1@2228.4,1935.21 ; U6.A15@2258.23,1925.41 ccw(c2247.37,1914.56) 2247.37,1929.91 ccw(c2247.37,1945.26) U6.A15@2258.23,1934.4
  Mid-Layer 1 w5: v1@1916.5,3085 cw(c1898.39,3085) 1911.2,3072.2 cw(c1924,3059.39) v1@1924,3077.5 ; v1(1924,3085) 1830,2991 1830,2608 2160,2278 2160,1993 v1(2223.09,1929.91) ; v1@2215.59,1929.91 ccw(c2197.49,1929.91) 2210.29,1942.71 ccw(c2223.09,1955.51) v1@2223.09,1937.41
  Bottom Layer w5: R8.2@1874,3143.5 cw(c1874,3110.91) 1897.05,3133.95 cw(c1920.09,3157) R8.2@1887.5,3157 ; R8.2@1874,3148.5 cw(c1874,3127.98) 1888.51,3142.49 cw(c1903.02,3157) R8.2@1882.5,3157 ; R8.2@1874,3157 1924,3107 v1(1924,3085) ; v1@1918.7,3090.3 ccw(c1905.89,3103.11) 1924,3103.11 ccw(c1942.11,3103.11) v1@1929.3,3090.3
G11: J5.9 U6.G11 | length 1966.7
  Top Layer w5: v1@2478.25,1784.68 cw(c2475.54,1764.7) U6.G11@2493,1774.78 ; v1@2478.92,1789.63 cw(c2477.27,1777.47) 2487.9,1783.61 ; v1@2479.26,1784.61 cw(c2479.26,1766.5) 2492.06,1779.31 cw(c2504.87,1792.11) v1@2486.76,1792.11 ; v1(2479.26,1792.11) U6.G11@2498.94,1772.43 ; v1@2481.23,1784.87 cw(c2483.04,1778.21) 2489.02,1781.66 ; v1@2481.74,1792.45 ccw(c2493.9,1794.1) 2487.76,1783.47 ; v1@2486.69,1793.12 ccw(c2506.67,1795.83) U6.G11@2496.59,1778.37 ; 2489.71,1782.35 cw(c2493.16,1788.33) v1@2486.5,1790.14 ; U6.G11@2492.59,1772.43 ccw(c2477.24,1772.43) 2488.09,1783.28 ccw(c2498.94,1794.13) U6.G11@2498.94,1778.78 ; v1@2486.5,1790.17 ccw(c2493.33,1788.34) 2487.21,1784.81 cw(c2493.33,1788.34) v1@2486.5,1790.17 ; v1@2481.2,1784.87 cw(c2483.03,1778.04) 2486.56,1784.16 ccw(c2483.03,1778.04) v1@2481.2,1784.87
  Bottom Layer w5: v1(2479.26,1792.11) 2500.15,1813 2526,1813 2557,1844 2557,2330 2855,2628 2855,3061.17 J5.9@2903,3109.17 ; v1@2479.26,1799.61 ccw(c2479.26,1817.72) 2492.06,1804.91 ccw(c2504.87,1792.11) v1@2486.76,1792.11 ; J5.9@2875.97,3109.17 cw(c2810.72,3109.17) 2856.86,3063.03 cw(c2903,3016.9) J5.9@2903,3082.15 ; J5.9@2880.97,3109.17 cw(c2827.79,3109.17) 2865.4,3071.57 cw(c2903,3033.97) J5.9@2903,3087.15 ; J5.9@2885.97,3109.17 cw(c2844.86,3109.17) 2873.93,3080.11 cw(c2903,3051.04) J5.9@2903,3092.15
G12: J5.12 U6.G12 | length 1786.1
  Top Layer w5: v1@2478.25,1824.05 cw(c2475.54,1804.07) U6.G12@2493,1814.15 ; v1@2478.92,1829 cw(c2477.27,1816.84) 2487.9,1822.98 ; v1@2479.26,1823.98 cw(c2479.26,1805.87) 2492.06,1818.68 cw(c2504.87,1831.48) v1@2486.76,1831.48 ; v1(2479.26,1831.48) U6.G12@2498.94,1811.8 ; v1@2481.23,1824.24 cw(c2483.04,1817.58) 2489.02,1821.03 ; v1@2481.74,1831.82 ccw(c2493.9,1833.47) 2487.76,1822.84 ; v1@2486.5,1829.51 ccw(c2493.16,1827.7) 2489.71,1821.72 ; v1@2486.69,1832.49 ccw(c2506.67,1835.2) U6.G12@2496.59,1817.74 ; U6.G12@2492.59,1811.8 ccw(c2477.24,1811.8) 2488.09,1822.65 ccw(c2498.94,1833.5) U6.G12@2498.94,1818.15 ; v1@2481.2,1824.24 cw(c2483.03,1817.41) 2486.56,1823.53 ccw(c2483.03,1817.41) v1@2481.2,1824.24 ; v1@2486.5,1829.54 ccw(c2493.33,1827.71) 2487.21,1824.18 cw(c2493.33,1827.71) v1@2486.5,1829.54
  Bottom Layer w5: v1(2479.26,1831.48) 2497.78,1850 2524,1850 2547,1873 2547,2346 2803,2602 J5.12@2803,3009.17 ; v1@2479.26,1838.98 ccw(c2479.26,1857.09) 2492.06,1844.28 ccw(c2504.87,1831.48) v1@2486.76,1831.48 ; J5.12@2783.89,2990.06 cw(c2737.75,2943.92) 2803,2943.92 cw(c2868.25,2943.92) J5.12@2822.11,2990.06 ; J5.12@2787.42,2993.6 cw(c2749.82,2955.99) 2803,2955.99 cw(c2856.18,2955.99) J5.12@2818.58,2993.6 ; J5.12@2790.96,2997.13 cw(c2761.89,2968.07) 2803,2968.07 cw(c2844.11,2968.07) J5.12@2815.04,2997.13
G14: J5.16 U6.G14 | length 1580.7
  Top Layer w5: v1@2478.25,1902.79 cw(c2475.54,1882.81) U6.G14@2493,1892.89 ; v1@2478.92,1907.74 cw(c2477.27,1895.58) 2487.9,1901.72 ; v1@2479.26,1902.72 cw(c2479.26,1884.61) 2492.06,1897.42 cw(c2504.87,1910.22) v1@2486.76,1910.22 ; v1(2479.26,1910.22) U6.G14@2498.94,1890.54 ; v1@2481.23,1902.98 cw(c2483.04,1896.32) 2489.02,1899.77 ; v1@2481.74,1910.56 ccw(c2493.9,1912.21) 2487.76,1901.58 ; v1@2486.5,1908.25 ccw(c2493.16,1906.44) 2489.71,1900.46 ; v1@2486.69,1911.23 ccw(c2506.67,1913.94) U6.G14@2496.59,1896.48 ; U6.G14@2492.59,1890.54 ccw(c2477.24,1890.54) 2488.09,1901.39 ccw(c2498.94,1912.24) U6.G14@2498.94,1896.89 ; v1@2481.2,1902.98 cw(c2483.03,1896.15) 2486.56,1902.27 ccw(c2483.03,1896.15) v1@2481.2,1902.98 ; v1@2486.5,1908.28 ccw(c2493.33,1906.45) 2487.21,1902.92 cw(c2493.33,1906.45) v1@2486.5,1908.28
  Bottom Layer w5: v1(2479.26,1910.22) 2479.26,1919.26 2499,1939 2499,2553 2603,2657 J5.16@2603,3009.17 ; J5.16@2583.89,2990.06 cw(c2537.75,2943.92) 2603,2943.92 cw(c2668.25,2943.92) J5.16@2622.11,2990.06 ; J5.16@2587.42,2993.6 cw(c2549.82,2955.99) 2603,2955.99 cw(c2656.18,2955.99) J5.16@2618.58,2993.6 ; J5.16@2590.96,2997.13 cw(c2561.89,2968.07) 2603,2968.07 cw(c2644.11,2968.07) J5.16@2615.04,2997.13
G16: RN12.8 U6.G16 | length 2293.3
  Top Layer w5: RN12.8@541.15,2316.62 568.84,2316.62 629.21,2377 2257,2377 2498.94,2135.06 U6.G16@2498.94,1969.28 ; RN12.8@556.76,2312.83 cw(c565.93,2303.65) 565.93,2316.62 cw(c565.93,2329.6) RN12.8@556.76,2320.42 ; U6.G16@2494.45,1973.77 ccw(c2483.59,1984.63) 2498.94,1984.63 ccw(c2514.3,1984.63) U6.G16@2503.44,1973.77
GND: C1.2 C2.2 C3.2 C4.1 C5.2 C6.2 C7.2 C8.2 C9.2 C10.2 C11.2 C12.2 C13.2 C14.2 C15.2 C16.2 C17.2 C18.2 C19.2 C20.2 C25.2 C27.2 C29.2 C30.2 C31.2 C32.2 C33.2 C34.2 C35.2 C36.2 C37.2 C38.2 C39.2 C40.2 C41.2 C42.2 C43.2 C44.2 C45.2 C46.2 C48.2 C49.2 D1.1 EC2.2 EC4.2 EC5.2 EC6.2 J1.5 J2.1 J2.37 J2.38 J3.1 J3.37 J3.38 J4.5 J4.6 J4.7 J4.8 J4.10 J5.2 K1.2 K2.2 K3.1 K4.2 K5.2 K6.1 LED0.2 LED1.2 LED2.2 LED3.2 LED6.2 LS1.2 P1.1 P2.1 P4.1 P5.1 P5.3 P5.5 P5.7 P5.9 P5.11 P5.13 R10.1 R20.1 R49.2 R51.2 U1.1 U2.2 U4.3 U5.1 U6.A1 U6.A16 U6.B7 U6.B11 U6.D4 U6.D13 U6.E9 U6.G2 U6.G8 U6.G15 U6.H7 U6.H9 U6.H12 U6.J5 U6.J8 U6.K7 U6.K9 U6.L2 U6.L15 U6.M8 U6.N13 U6.P3 U6.R6 U6.R10 U6.T1 U6.T16 U8.4 U9.6 U9.12 U9.28 U9.41 U9.46 U9.52 U9.54 U10.2 U11.4 U12.1 U12.2 U12.3 U12.4 U12.7 U14.6 U14.11 U14.12 U14.13 X1.2 Y1.0 | length 8366.7
  Top Layer w10: v1@697.09,2854.09 cw(c688.56,2845.56) 700.63,2845.56 cw(c712.7,2845.56) v1@704.17,2854.09 ; U4.3@700.63,2814 v1(700.63,2857.63) ; LED1.2@3878.33,897 v2@3933,897 ; LED1.2@3892.48,882.86 cw(c3926.62,848.72) 3926.62,897 cw(c3926.62,945.28) LED1.2@3892.48,911.14 ; 3907.29,891.82 cw(c3913.63,868.16) v2@3928.1,887.93 ; 3907.44,897 cw(c3907.44,869.44) v2@3926.93,888.93 ; 3908.23,901.93 ccw(c3915.32,928.36) v2@3929,904.66 ; 3912.27,897 ccw(c3912.27,917.73) v2@3926.93,903.07 ; 3912.64,900.75 cw(c3907.23,880.54) v2@3925.34,891 ; 3916.64,894.33 ccw(c3912.94,908.16) v2@3925.34,901 ; LED2.2@4116.67,897 v2(4173,897) ; LED2.2@4130.81,882.86 cw(c4164.95,848.72) 4164.95,897 cw(c4164.95,945.28) LED2.2@4130.81,911.14 ; 4144.3,891.47 cw(c4152.38,861.31) v2@4168,888.34 ; 4144.3,902.53 ccw(c4152.38,932.69) v2@4168,905.66 ; 4154,894.07 ccw(c4149.59,910.51) v2@4164.34,902 ; 4154,899.93 cw(c4149.59,883.49) v2@4164.34,892 ; v2@4165.93,889.93 ccw(c4148.86,872.86) 4148.86,897 ccw(c4148.86,921.14) v2@4165.93,904.07 ; LED3.2@4355,897 v2@4411,897 ; LED3.2@4369.14,882.86 cw(c4403.28,848.72) 4403.28,897 cw(c4403.28,945.28) LED3.2@4369.14,911.14 ; 4384.53,902.02 ccw(c4391.1,926.52) v2@4406.09,906.07 ; 4385.34,892.19 cw(c4392.73,864.62) v2@4407,889.34 ; 4385.44,897 ccw(c4385.44,924.56) v2@4404.93,905.07 ; 4390.27,897 cw(c4390.27,876.27) v2@4404.93,890.93 ; 4391.35,893.8 ccw(c4386.25,912.87) v2@4403.34,903 ; 4395.36,899.12 cw(c4391.96,886.43) v2@4403.34,893
  Top Layer w15: P2.1@1776.42,3066.42 cw(c1738.82,3028.82) 1792,3028.82 cw(c1845.18,3028.82) P2.1@1807.58,3066.42 ; C45.2@1781.46,3004.78 ccw(c1756.03,3030.21) 1792,3030.21 ; C45.2@1785,3001.24 1792,3008.24 P2.1@1792,3082 ; v2(1973,2095) 1976,2092 U11.4@2034,2092 ; v2@1978.3,2100.3 ccw(c1998.35,2120.35) 1998.35,2092 ; v1@2223.63,1969.28 U6.A16@2262.72,1969.28 ; v1(2262.72,1339.35) U6.A1@2262.72,1378.72 ; P4.1@2283.42,3063.42 cw(c2245.82,3025.82) 2299,3025.82 cw(c2352.18,3025.82) P4.1@2314.58,3063.42 ; C49.2@2294.46,2995.78 ccw(c2283.51,3006.73) 2299,3006.73 ; C49.2@2298,2992.24 2299,2993.24 P4.1@2299,3079 ; v2(2395,2413) D1.1@2452,2413 ; v2@2398.75,2406.5 cw(c2408.99,2388.77) 2414.29,2408.55 ; v2@2398.75,2419.5 ccw(c2408.99,2437.23) 2414.29,2417.45 ; v2@2400.3,2407.7 cw(c2413.11,2394.89) 2413.11,2413 cw(c2413.11,2431.11) v2@2400.3,2418.3 ; v2@2401.5,2409.25 cw(c2415.12,2401.38) 2411.05,2416.58 ; v2@2401.5,2416.75 ccw(c2415.12,2424.62) 2411.05,2409.42 ; D1.1@2436.09,2397.09 ccw(c2397.68,2358.68) 2397.68,2413 ccw(c2397.68,2467.32) D1.1@2436.09,2428.91 ; U9.54@2545,897 2545,860 2572,833 v2(2608,833) U9.52@2607.99,897 ; U9.54@2546,868 ccw(c2567.73,868) 2552.36,852.64 ; v2@2602.7,827.7 ccw(c2589.89,814.89) 2589.89,833 ccw(c2589.89,851.11) 2602.7,838.3 ccw(c2589.91,851.09) 2607.99,851.09 ; 2607.99,851.13 ccw(c2626.13,851.13) v2@2613.3,838.3 ; v2@2697.18,381.82 ccw(c2684.37,394.63) 2702.48,394.63 ccw(c2720.59,394.63) v2@2707.78,381.82 ; v2(2702.48,376.52) U9.6@2702.48,437 ; v2@2791.67,955.7 cw(c2778.86,942.89) 2796.97,942.89 cw(c2815.08,942.89) v2@2802.27,955.7 ; v2@2795.37,968.33 ccw(c2789.11,997.13) C35.2@2813.9,981.19 ; U9.46@2796.97,897 2796.97,973.21 C35.2@2813.76,990 ccw(c2837.12,966.63) v2@2804.4,962.04 ; 2796.97,937.4 cw(c2866.36,937.4) C35.2@2817.29,986.46 ; v2@2796.97,966.26 cw(c2815.8,966.26) C35.2@2814.18,985.02 ; v2@2796.97,973.61 cw(c2830.14,973.61) C35.2@2806.68,997.07 ; 2799.95,984.74 ccw(c2823.1,978.53) v2@2803.2,965.18 ; U6.T1@2853.28,1378.72 v1@2890.72,1378.72 ; U6.T16@2853.28,1969.28 v1(2876,1992) ; v2@2886.15,380.85 ccw(c2873.35,393.65) 2891.46,393.65 ccw(c2909.56,393.65) v2@2896.76,380.85 ; v2(2891.46,375.54) U9.12@2891.46,437 ; v2@2949.15,843.3 ccw(c2936.34,856.11) 2954.45,856.11 ccw(c2972.56,856.11) v2@2959.75,843.3 ; v2(2954.45,838) U9.41@2954.45,907.55 ; v2(3334,826) 3363.9,855.9 U9.28@3363.9,897 ; v2@3334,833.5 ccw(c3334,851.61) 3346.8,838.8 ccw(c3359.61,826) v2@3341.5,826 ; X1.2@3334,1633 X1.2@3345,1622 ; 3353.63,845.63 ccw(c3331.27,868) U9.28@3362.9,868 ; R20.1@3445,1897 v1(3484,1897) ; R20.1@3451.01,1890.99 cw(c3465.52,1876.48) 3465.52,1897 cw(c3465.52,1917.52) R20.1@3451.01,1903.01 ; C37.2@3580,2608.24 v1(3580,2631) ; LED0.2@3640,897 v2@3690,897 ; LED0.2@3652.37,884.63 cw(c3682.25,854.75) 3682.25,897 cw(c3682.25,939.25) LED0.2@3652.37,909.37 ; 3666.53,901.21 ccw(c3673.2,926.09) v2@3686.99,904.34 ; 3670.14,893.76 cw(c3675.98,871.98) v2@3687.25,891.5 ; 3670.48,897 ccw(c3670.48,918.52) v2@3685.7,903.3 ; 3675.31,897 cw(c3675.31,882.31) v2@3685.7,892.7 ; 3676.2,895.38 ccw(c3672.67,908.59) v2@3684.5,901.75 ; C3.2@3724.24,1551 v2@3805,1551 ; C46.2@3747.99,1501.01 ccw(c3733.48,1515.52) 3754,1515.52 ccw(c3774.52,1515.52) C46.2@3760.01,1501.01 ; C46.2@3754,1495 3754,1549 ; 3784.48,1551 cw(c3784.48,1529.48) v2@3799.7,1544.7 ; 3789.31,1551 ccw(c3789.31,1565.69) v2@3799.7,1555.3 ; U8.4@4140,1455 v1(4185,1455) ; v2@4325.74,517.35 ccw(c4312.94,530.15) 4331.05,530.15 ccw(c4349.15,530.15) v2@4336.35,517.35 ; v2(4331.05,512.05) U14.6@4331.05,568.82 ; v2@4411.7,728.7 cw(c4398.89,715.89) 4417,715.89 cw(c4435.11,715.89) v2@4422.3,728.7 ; C43.2@4417,697.24 v2(4417,734) ; v2@4436.7,1531.3 ccw(c4423.89,1544.11) 4442,1544.11 ccw(c4460.11,1544.11) v2@4447.3,1531.3 ; v2(4442,1526) C4.1@4442,1559
  Top Layer w17.72: v1(2284,1596.85) U6.B7@2302.09,1614.94 ; v1(2284,1790.52) U6.B11@2302.09,1772.43 ; v1(2361.15,1477.15) U6.D4@2380.83,1496.83 ; v1(2361.15,1870.85) U6.D13@2380.83,1851.17 ; v1(2400.52,1713.37) U6.E9@2420.2,1693.68 ; v1(2479.26,1634.63) U6.G8@2498.94,1654.32 ; v1(2479.85,1399) U6.G2@2498.94,1418.09 ; v1(2481,1947.85) U6.G15@2498.94,1929.91 ; v1(2518.63,1595.26) U6.H7@2538.32,1614.94 ; v1(2518.63,1713.37) U6.H9@2538.32,1693.68 ; v1(2518.63,1831.48) U6.H12@2538.32,1811.8 ; U6.J5@2577.68,1536.2 v1(2597.37,1516.52) ; U6.J8@2577.68,1654.32 v1(2597.37,1634.63) ; U9.52@2607.99,897 2607.99,980.24 C34.2@2619.76,992 ; 2607.99,954.81 cw(c2656.95,954.81) C34.2@2622.33,989.42 ; U6.K7@2617.06,1614.94 v1(2636.74,1595.26) ; U6.K9@2617.06,1693.68 v1(2636.74,1713.37) ; U6.L2@2656.43,1418.09 v1@2673.52,1401 ; U6.L15@2656.43,1929.91 v1(2674.52,1948) ; U6.M8@2695.8,1654.32 v1(2715.48,1634.63) ; U6.N13@2735.17,1851.17 v1(2754.85,1870.85) ; U6.P3@2774.54,1457.46 v1(2794.22,1437.78) ; U6.R6@2813.91,1575.57 v1(2831.48,1558) ; U6.R10@2813.91,1733.06 v1(2832,1751.15)
  Top Layer w19.68: v3(453,2883) C1.2@499,2883 501.94,2883 C2.2@501.94,2949 ; v3@460.18,2875.82 cw(c477.52,2858.48) 477.52,2883 cw(c477.52,2907.52) v3@460.18,2890.18 ; C2.2@493.59,2935.53 cw(c473.43,2915.37) 501.94,2915.37 cw(c530.46,2915.37) C2.2@510.3,2935.53 ; C1.2@494.65,2887.35 ccw(c477.02,2904.98) 501.94,2904.98 ; LED6.2@1295,3090 1329,3056 ; LED6.2@1295.14,3069.84 cw(c1295.58,3022.58) 1329,3056 ; LED6.2@1310.16,3085 ccw(c1334.68,3085) LED6.2@1317.34,3067.66 ; v2(1390,3056) 1329,3056
  Top Layer w20: K1.2@1454.58,89.58 cw(c1424.61,59.61) 1467,59.61 cw(c1509.39,59.61) K1.2@1479.42,89.58 ; v2@1462.67,53.09 ccw(c1445.31,63.11) 1464.67,68.3 ; v2(1467,50.59) K1.2@1467,102 ; 1469.33,68.3 ccw(c1488.69,63.11) v2@1471.33,53.09 ; K2.2@2022.25,89.58 cw(c1992.28,59.61) 2034.67,59.61 cw(c2077.06,59.61) K2.2@2047.08,89.58 ; v2@2030.34,53.09 ccw(c2012.98,63.11) 2032.34,68.3 ; v2(2034.67,50.59) K2.2@2034.67,102 ; 2036.99,68.3 ccw(c2056.35,63.11) v2@2039,53.09 ; v2@2512,298.76 C30.2@2545,298.76 ; K3.1@2589.92,86.79 cw(c2559.94,56.81) 2602.33,56.81 cw(c2644.72,56.81) K3.1@2614.75,86.79 ; v2@2598,47.7 ccw(c2578.67,58.87) 2600.23,64.65 ; v2(2602.33,45.2) K3.1@2602.33,99.2 ; 2604.43,64.65 ccw(c2626,58.87) v2@2606.66,47.7 ; C29.2@2607.99,297.76 2607.99,298 v2(2645,298) ; C31.2@2797,297.76 v2(2824.24,297.76) ; C32.2@2955,300.76 v2(2990.76,300.76) ; K4.2@3157.58,89.58 cw(c3127.61,59.61) 3170,59.61 cw(c3212.39,59.61) K4.2@3182.42,89.58 ; v2@3165.67,53.09 ccw(c3148.31,63.11) 3167.67,68.3 ; v2(3170,50.59) K4.2@3170,102 ; 3172.33,68.3 ccw(c3191.69,63.11) v2@3174.33,53.09 ; U12.4@3277,2412 U12.3@3277,2462 U12.2@3277,2512 U12.1@3277,2562 v2(3277,2606) ; C33.2@3364,300.76 v2(3392.76,300.76) ; U12.7@3497,2512 v1(3546,2512) ; K6.1@3690.58,453.58 cw(c3660.61,423.61) 3703,423.61 cw(c3745.39,423.61) K6.1@3715.42,453.58 ; K5.2@3693.58,93.58 cw(c3663.61,63.61) 3706,63.61 cw(c3748.39,63.61) K5.2@3718.42,93.58 ; v2@3698.67,414.5 ccw(c3679.33,425.66) 3700.9,431.44 ; v2@3701.67,57.09 ccw(c3684.31,67.11) 3703.67,72.3 ; v2(3703,412) K6.1@3703,466 ; 3705.1,431.44 ccw(c3726.67,425.66) v2@3707.33,414.5 ; v2(3706,54.59) K5.2@3706,106 ; 3708.33,72.3 ccw(c3727.69,67.11) v2@3710.33,57.09
  Bottom Layer w10: v1(2183,1872) C13.2@2210.76,1872 ; v1@2186.22,1868.18 cw(c2194.28,1858.61) 2197.52,1870.69 ; v1@2186.22,1875.82 ccw(c2194.28,1885.39) 2197.52,1873.31 ; v1@2186.54,1868.46 cw(c2195.07,1859.93) 2195.07,1872 cw(c2195.07,1884.07) v1@2186.54,1875.54 ; C14.2@2203.45,1718.3 ccw(c2190.65,1731.11) 2208.76,1731.11 ccw(c2226.86,1731.11) C14.2@2214.06,1718.3 ; v1@2205.22,1787.22 cw(c2196.68,1778.68) 2208.76,1778.68 cw(c2220.83,1778.68) v1@2212.29,1787.22 ; C13.2@2205.45,1866.7 ccw(c2192.65,1853.89) 2192.65,1872 ccw(c2192.65,1890.11) C13.2@2205.45,1877.3 ; C14.2@2208.76,1713 v1(2208.76,1790.76) ; C12.2@2355.7,2031.55 ccw(c2342.89,2044.35) 2361,2044.35 ccw(c2379.11,2044.35) C12.2@2366.3,2031.55 ; v1@2357.46,2058.46 cw(c2348.93,2049.93) 2361,2049.93 cw(c2373.07,2049.93) v1@2364.54,2058.46 ; C12.2@2361,2026.24 v1(2361,2062) ; C11.2@2634.33,1987.77 cw(c2632.73,1969.74) 2646.62,1981.36 cw(c2660.51,1992.97) C11.2@2642.47,1994.58 ; C11.2@2635,1995.24 v1(2674.52,1948) ; v1@2669.54,1948.44 ccw(c2657.52,1949.51) 2666.77,1957.26 ccw(c2676.03,1965) v1@2674.96,1952.98 ; v1@2832,1746.15 cw(c2832,1734.08) 2840.54,1742.61 cw(c2849.07,1751.15) v1@2837,1751.15 ; v1(2832,1751.15) 2857.15,1726 2930,1726 R51.2@2956,1752 ; R51.2@2945,1752 cw(c2918.44,1752) 2937.22,1733.22 cw(c2956,1714.44) R51.2@2956,1741 ; v2@3992.93,2902.93 cw(c3975.86,2885.86) 4000,2885.86 cw(c4024.14,2885.86) v2@4007.07,2902.93 ; 4000,2875 v2(4000,2910)
  Bottom Layer w15: v2@2117.45,2269.45 cw(c2104.65,2256.65) 2122.76,2256.65 cw(c2140.86,2256.65) v2@2128.06,2269.45 ; C36.2@2122.76,2242 v2(2122.76,2274.76) ; R49.2@2205,1428 2236.76,1459.76 C16.2@2236.76,1507 ; R49.2@2205,1436.5 ccw(c2205,1457.02) 2219.51,1442.51 ccw(c2234.02,1428) R49.2@2213.5,1428 ; C17.2@2598,1321.76 C18.2@2754,1321.76 ; C5.2@2603.99,2112.06 ccw(c2579.83,2136.22) 2614,2136.22 ccw(c2648.17,2136.22) C5.2@2624.01,2112.06 ; C5.2@2614,2102.06 v1(2614,2159) ; 2677,1323.76 v1(2677,1353) ; C38.2@3956,2875 4000,2875 4090,2875 ; C38.2@3961.01,2869.99 cw(c3973.11,2857.89) 3973.11,2875 ; C38.2@3961.01,2882.01 ccw(c3977.94,2898.93) 3977.94,2875 ; 4022.06,2875 ccw(c4022.06,2898.93) C39.2@4038.99,2882.01 ; 4026.89,2875 cw(c4026.89,2857.89) C39.2@4038.99,2869.99 ; C39.2@4051.01,2869.99 cw(c4063.11,2857.89) 4063.11,2875 ; C39.2@4051.01,2882.01 ccw(c4067.94,2898.93) 4067.94,2875 ; v2@4085.7,2907.7 cw(c4075.31,2897.31) 4090,2897.31 ; 4090,2892.48 cw(c4111.52,2892.48) v2@4096.3,2907.7 ; v2@4090,2912 4090,2875 ; C40.2@4128.99,2868.99 ccw(c4114.48,2854.48) 4114.48,2875 ccw(c4114.48,2895.52) C40.2@4128.99,2881.01 ; C41.2@4135,3404 4179.5,3404 ; C41.2@4141.01,3397.99 cw(c4155.52,3383.48) 4155.52,3404 cw(c4155.52,3424.52) C41.2@4141.01,3410.01 ; C40.2@4149,2875 C40.2@4135,2875 4090,2875 ; v2@4174.2,3385.8 ccw(c4161.39,3398.61) 4179.5,3398.61 ccw(c4197.61,3398.61) v2@4184.8,3385.8 ; v2(4179.5,3380.5) 4179.5,3404 ; 4202.06,3404 ccw(c4202.06,3427.93) C42.2@4218.99,3411.01 ; 4206.89,3404 cw(c4206.89,3386.89) C42.2@4218.99,3398.99 ; C42.2@4224,3404 4179.5,3404
  Bottom Layer w17.72: C19.2@2171,1582.94 2184.91,1596.85 v1(2212.15,1596.85) ; C19.2@2188.36,1579.22 cw(c2212.15,1571.99) v1(2212.15,1596.85) ; C16.2@2236.76,1507 2236.76,1593.61 ; v1(2284,1596.85) v1(2212.15,1596.85) ; v1(2361.15,1287.15) C15.2@2361.15,1321.76
  Bottom Layer w19.68: U2.2@697,3082.4 726.6,3082.4 749,3060 v3(749,2997) ; U2.2@712.16,3082.4 cw(c712.16,3047.54) 736.81,3072.19 ; v3@741.82,3004.18 ccw(c724.48,3021.52) 749,3021.52 ccw(c773.52,3021.52) v3@756.18,3004.18 ; C6.2@2519.24,1677 2519.24,1712.76 C8.2@2556,1712.76 ; C7.2@2558,1638.24 2593.76,1638.24 2596.76,1635.24 C9.2@2596.76,1677 ; C10.2@2755,2022.24 v1(2755,2047) ; R10.1@2874,1952 2874,1913.24 C20.2@2886.24,1901 ; C27.2@2913.24,1479 v1(2940,1479) ; C25.2@2914.24,1634 v1(2943,1634)
  Bottom Layer w20: R10.1@2869.76,1956.24 ccw(c2854.69,1971.31) 2876,1971.31 ; R10.1@2874,1952 2876,1954 v1(2876,1992)
  other v1: 4592,278 4458,283 4301,288 783,503 785,672 788,845 791,984 793.49,1358 715,1361 2892,1380 2676,1399 3398,1593 3398,1618 3398,1646 2223.35,1969 4237.71,2015 3166,2016 3240,2016 4070,2016 3098,2017 3862,2019 1932,2284.24 1680,2286 1796,2288 4118,2352 4272,2352 4419,2352 2791,2358 2905,2472 892,2479 1049,2479 754,2483 2136,2530 1603,2534
  other v2: 4764,241 4156,244 4763,287 4155,289 2512,298 4731,458 4730,501 3934,896 3691,898 4412,898 2796.97,961 3805,1550 1678,2165 679,2214 741,2214 679,2259 742,2259 1648,2497 2171,2497 1567,2498 2101,2498 2169,2568 2103,2570 1646,2572 1566,2574 1943,2888 1908,2912 4091,2913 1942,2938 1442,3055 1490,3055 501,3070 537,3071 501,3108 537,3109